# Altium PCB AltiumSTM32_PCB1.PcbDoc
Units mil, origin at the board's own origin, x right, y up, seen from the top; angles counter-clockwise.
Board outline 1427.17 x 1427.17 mil, 4 copper layers (L1(Signal), L2(GND), L3(GND), Bottom Layer), stack 61.811 mil thick; 35 components, 27 nets, 170 pads, 66 vias.
Unrouted connection lines stored in the file: 3.
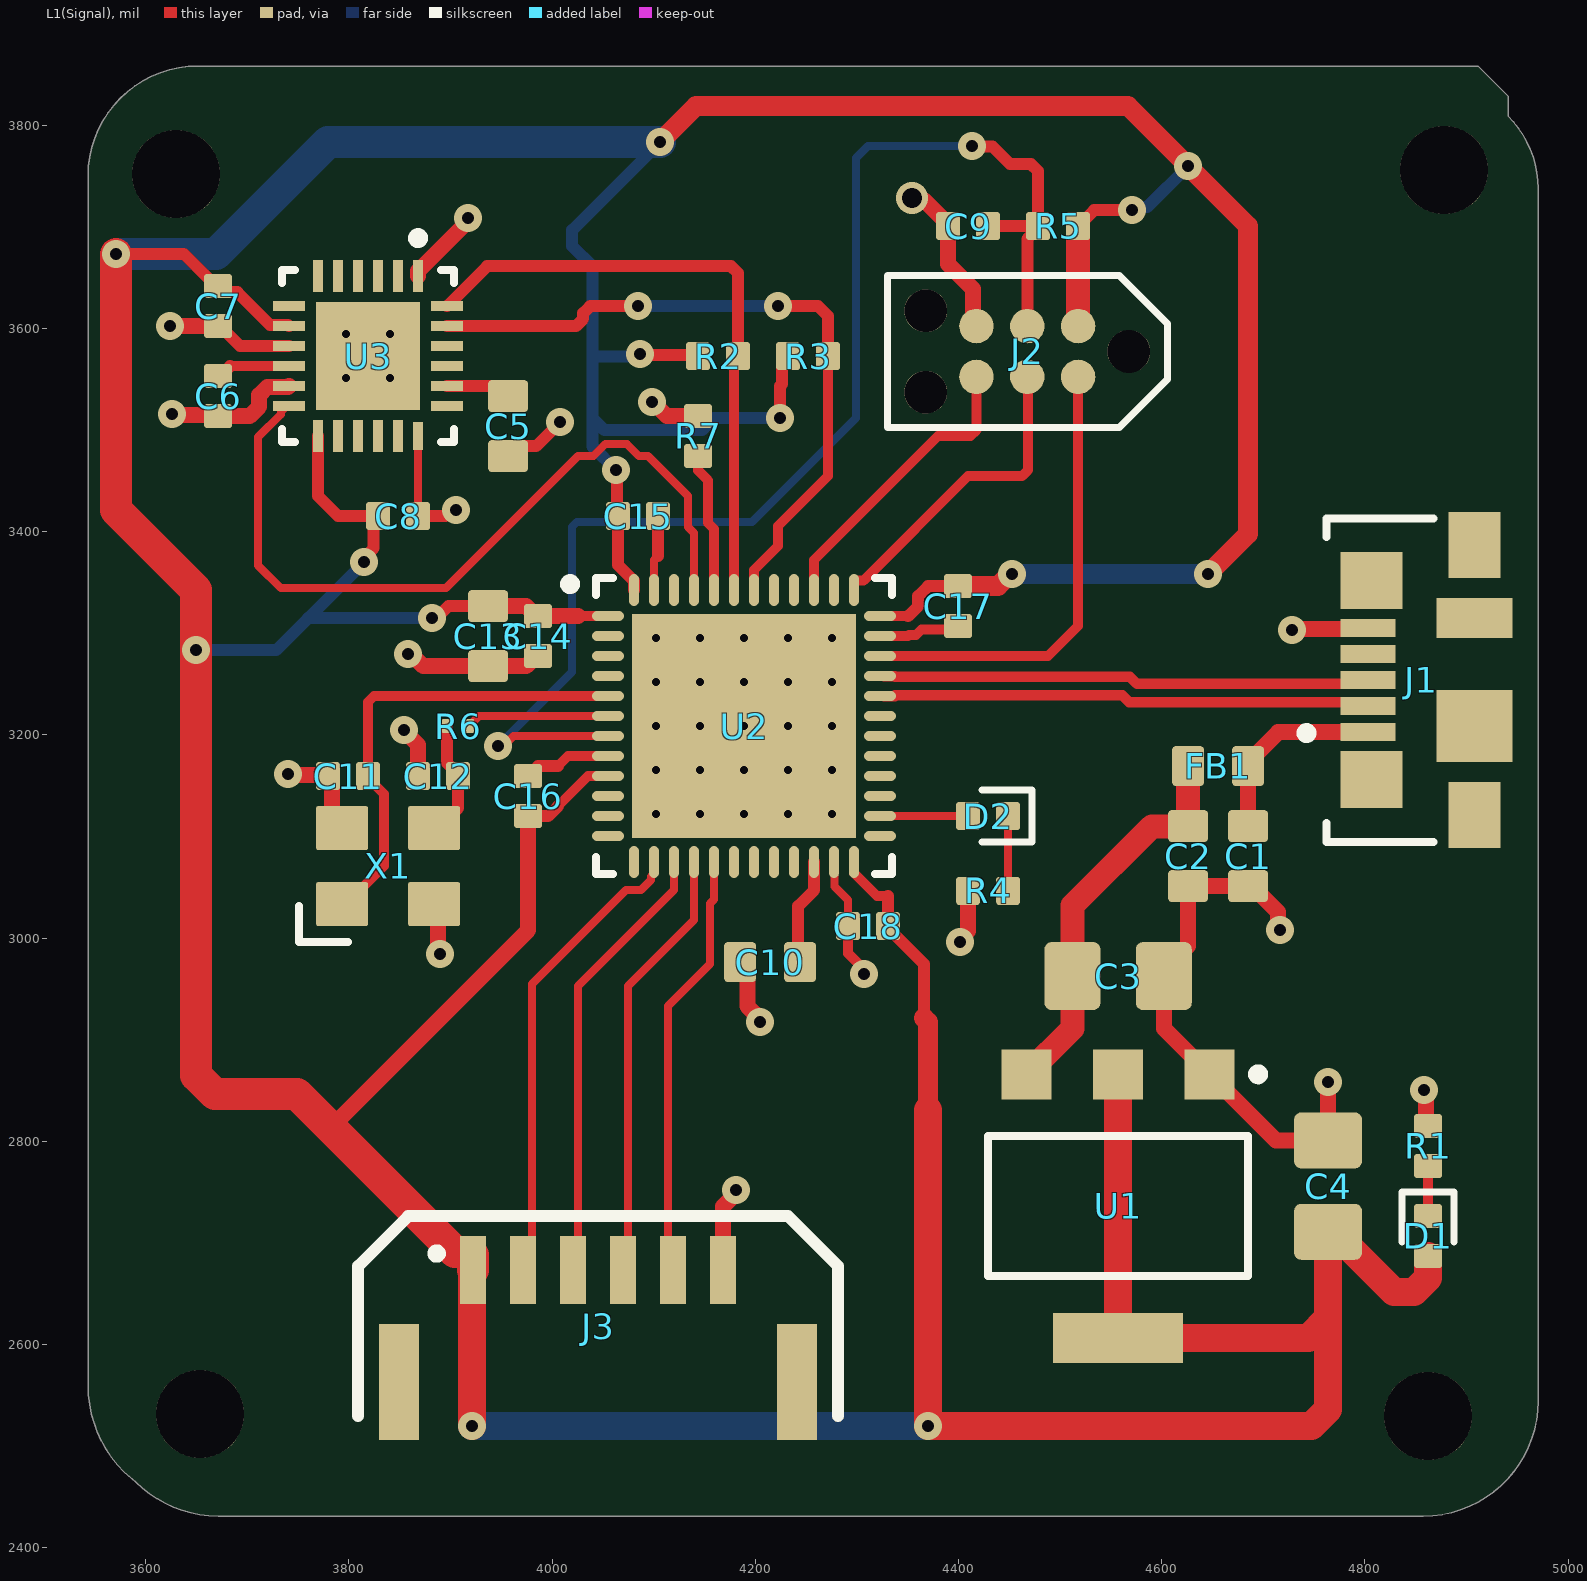
[diagram p0: L1(Signal) view]
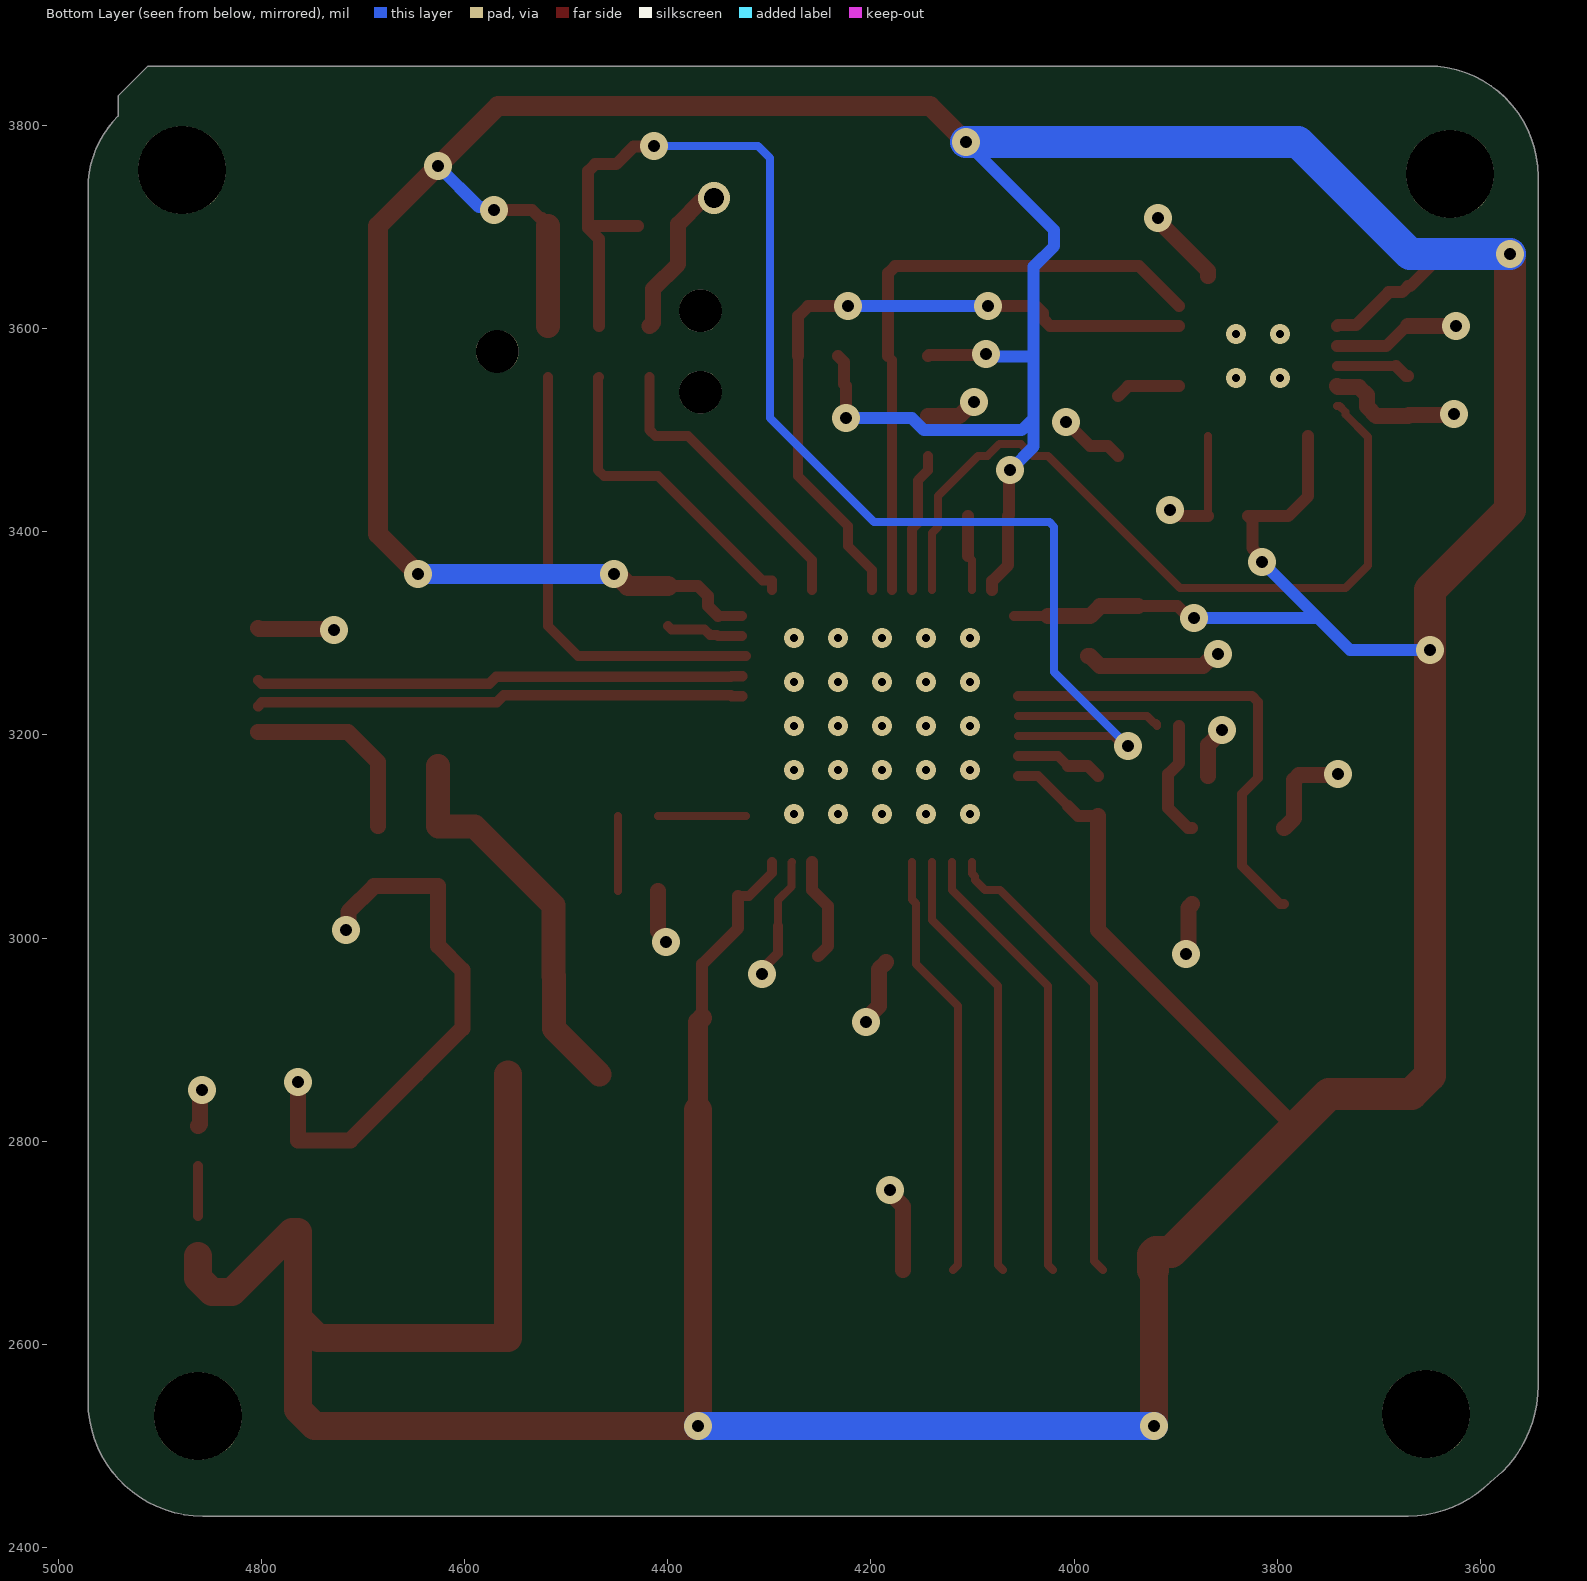
[diagram p1: Bottom Layer view, seen from below]
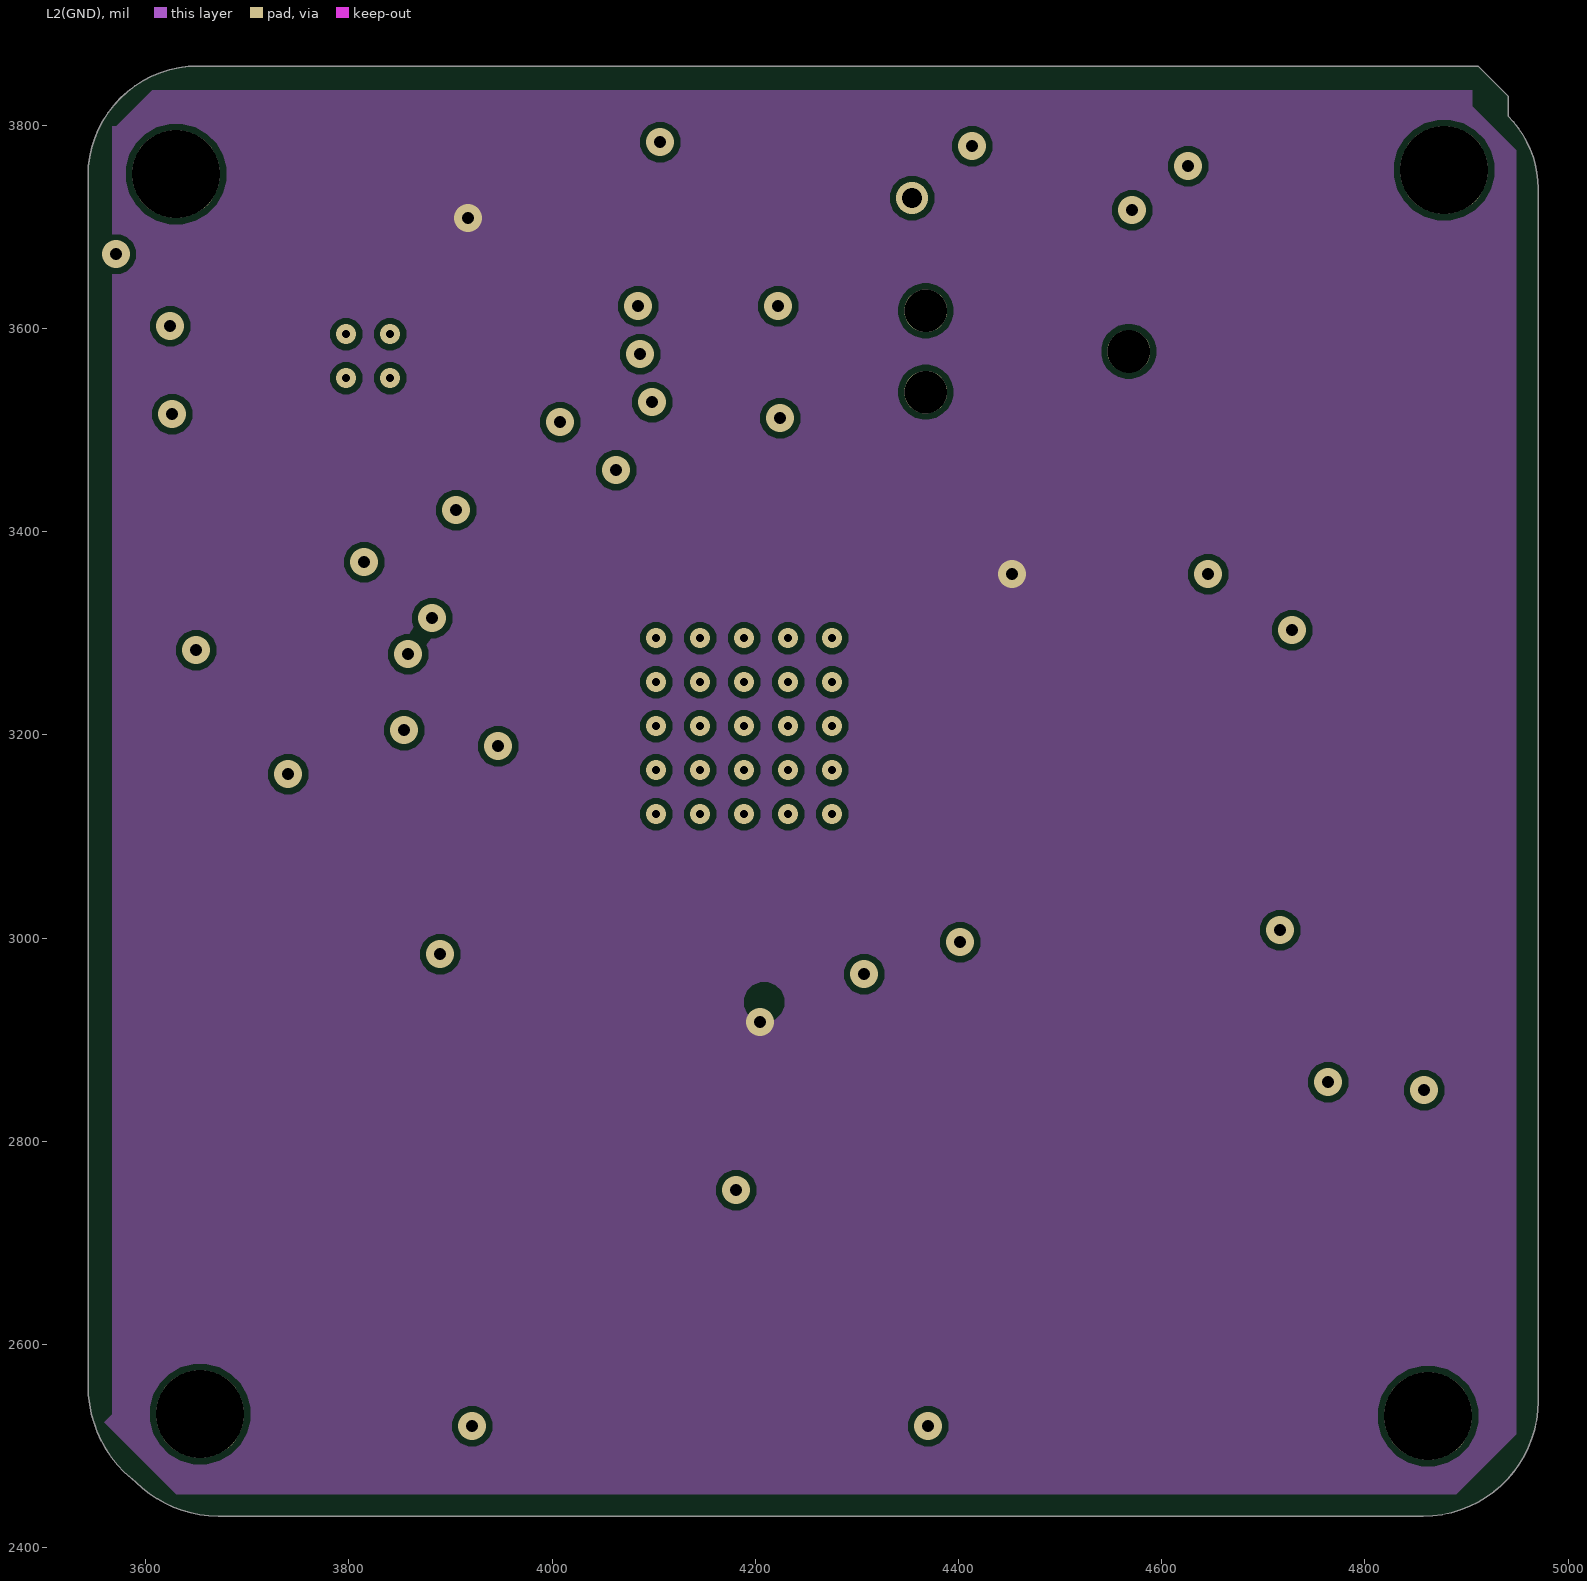
[diagram p2: L2(GND)]
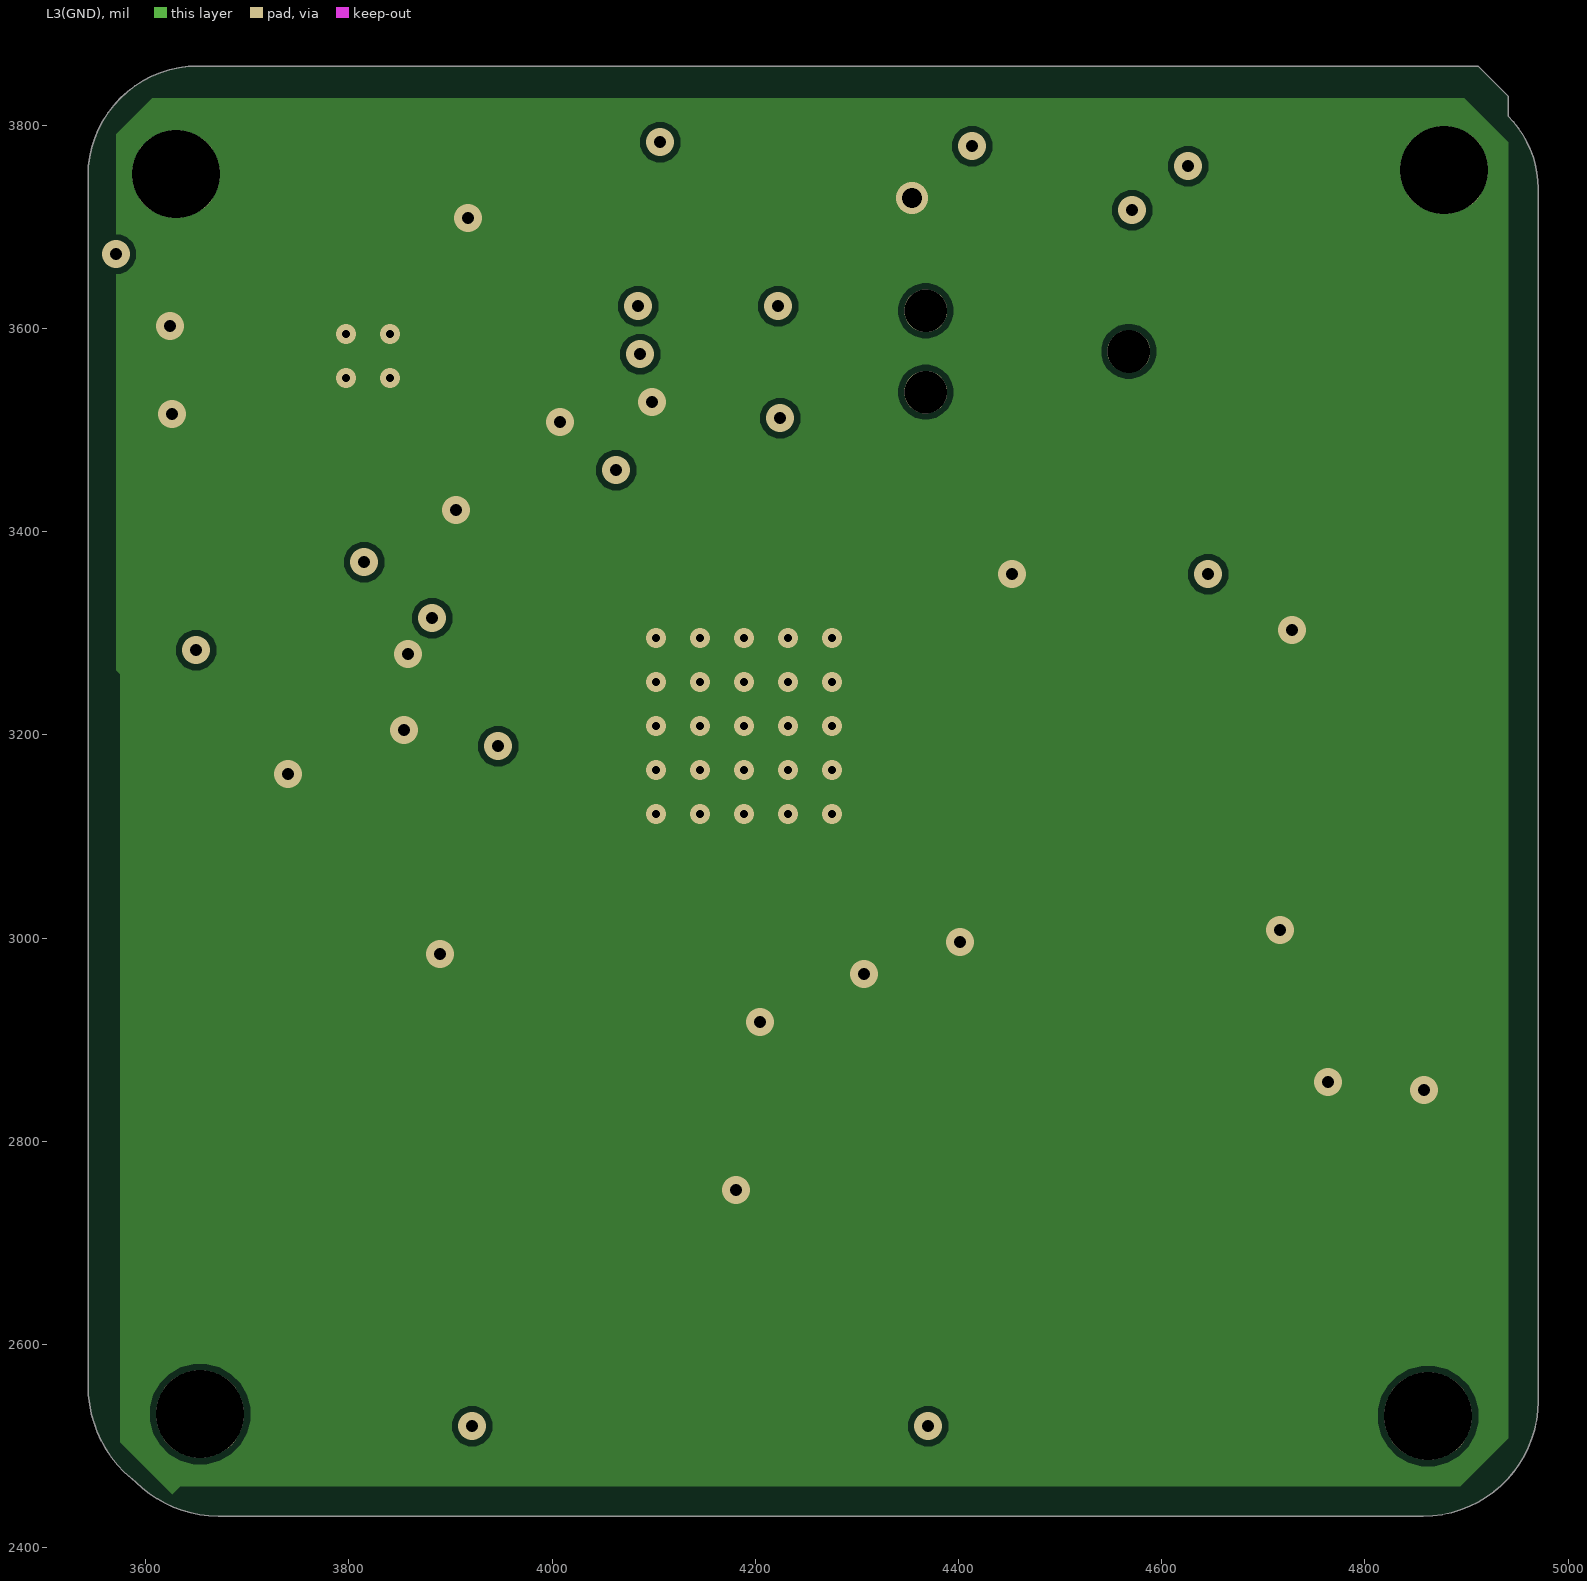
[diagram p3: L3(GND)]
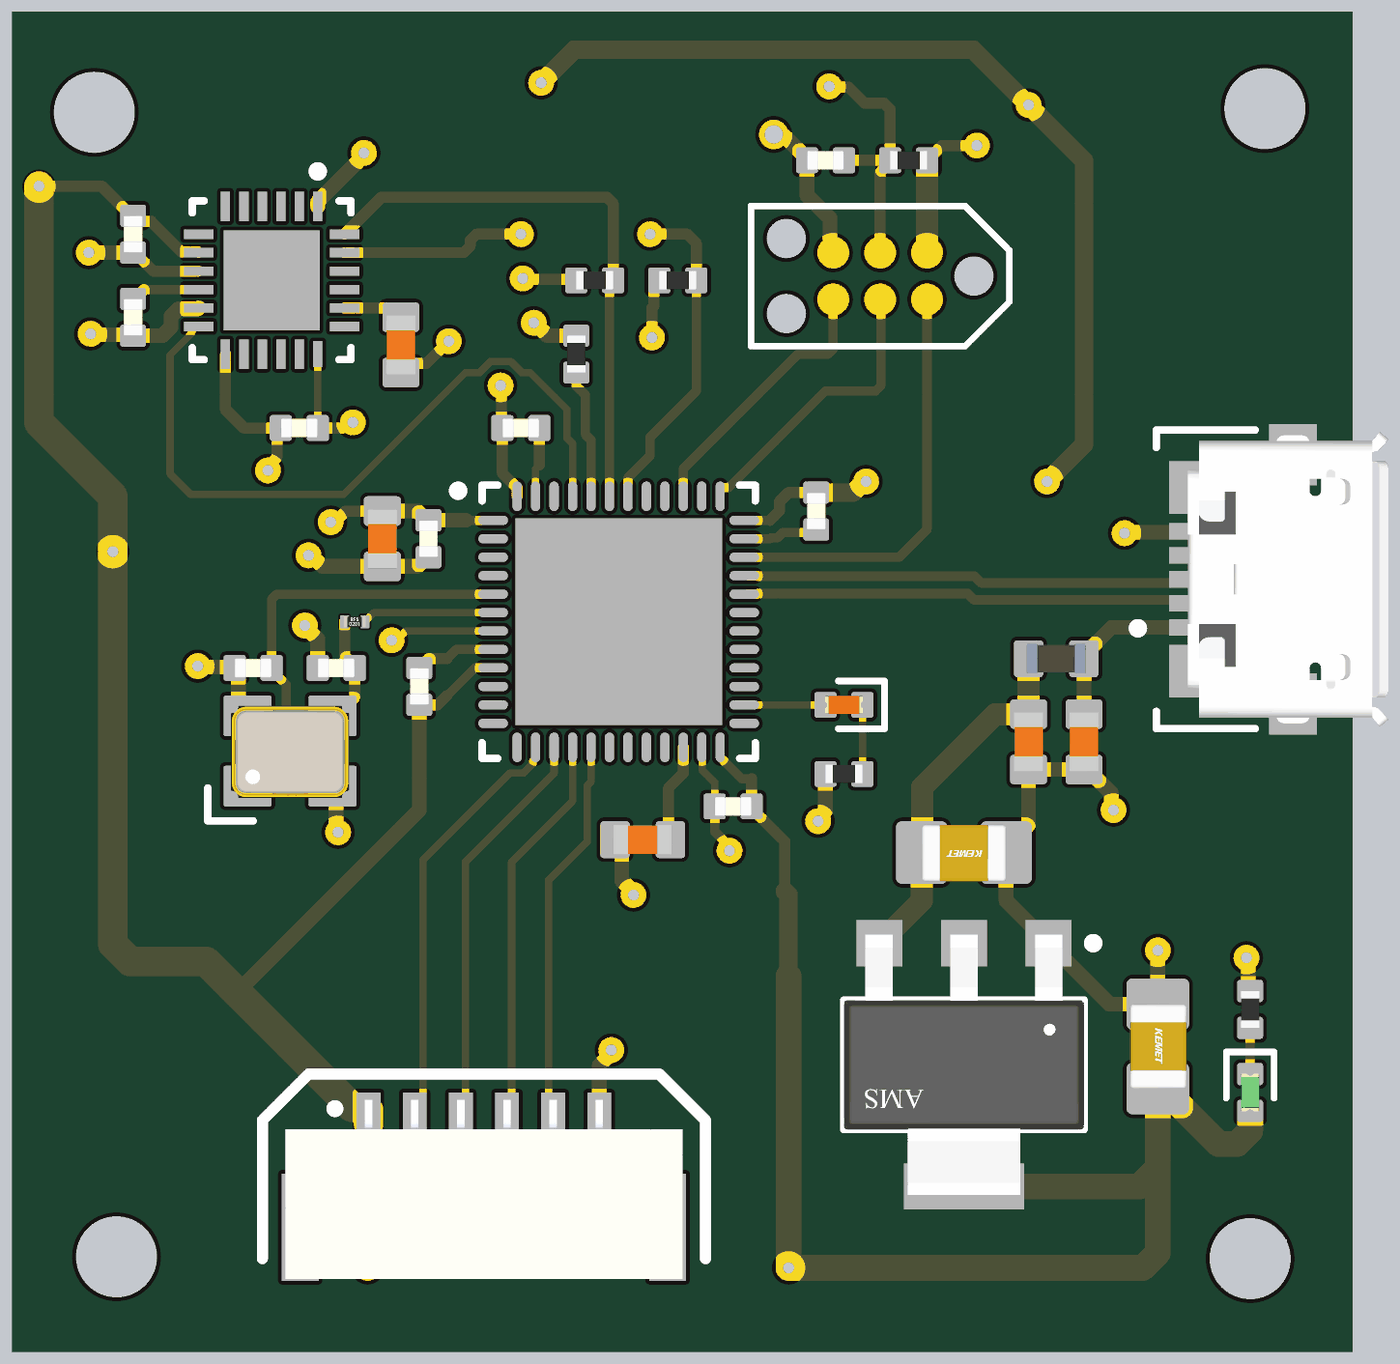
[diagram p4: 3D render of the assembled board from above, using the file's embedded part models]

## Layer stack, top to bottom
Top Solder: solder mask 1, SM-001, Dk 4
L1(Signal): signal copper 1.378
Dielectric 1: prepreg 7.874, PP-022, Dk 4.6
L2(GND): signal copper 0.689
Dielectric 3: core 41.9291, Core-039, Dk 4.6
L3(GND): signal copper 0.689
Dielectric 5: prepreg 7.874, PP-022, Dk 4.6
Bottom Layer: signal copper 1.378
Bottom Solder: solder mask 1, SM-001, Dk 4

## Board outline
3578.66,2474.49 3590.28,2464.64 ccw(c3671.26,2545.62) 3671.26,2431.1 4857.56,2431.1 ccw(c4857.56,2544.02) 4970.47,2544.02 4970.47,3737.77 ccw(c4869.66,3737.77) 4940.94,3809.06 4940.94,3828.74 4911.42,3858.27 4822.05,3858.27 3651.57,3858.27 ccw(c3651.57,3750) 3543.31,3750 3543.31,2559.84 ccw(c3664.02,2559.84)

## Design rules (kind name [scope] priority, off if disabled: settings)
Clearance Clearance_2 [All] p1: gap=5.91 ignorepadtopadclearanceinfootprint=FALSE
DiffPairsRouting [All] p1: maxlimit=8 minlimit=5 mostfreqgap=8 toplayer_mingap=8 toplayer_minwidth=10.24 toplayer_maxwidth=10.24 toplayer_prefwidth=10.24 bottomlayer_mingap=8 bottomlayer_minwidth=10.24 bottomlayer_maxwidth=10.24 bottomlayer_prefwidth=10.24 impedanceprofiledriven=TRUE impedanceprofileid={871EB140-BF40-4113-B43B-66A4798AFD4B} impedanceprofilevalue=90.000000 maxuncoupledlength=500
PolygonConnect [All] p1: connectstyle=Direct reliefconductorwidth=10 reliefentries=4 polygonreliefangle="90 Angle" airgapwidth=10
RoutingVias [All] p1: holewidth=11.81 width=27.56 viastyle="Through Hole" minholewidth=9.84 minwidth=19.68 maxholewidth=15.75 maxwidth=35.43
SolderMaskExpansion [All] p1: expansion=4 istentingtop=FALSE
SupplyNets "Schematic Supply Nets_3" [InNet('VBUS')] p1: voltage=0.000
SupplyNets "Schematic Supply Nets_2" [InNet('+3V3')] p2: voltage=0.000
SupplyNets "Schematic Supply Nets_1" [InNet('+5V')] p3: voltage=0.000
SupplyNets "Schematic Supply Nets" [InNet('GND')] p4: voltage=0.000
UnRoutedNet [All] p1: checkbadconnections=TRUE
Width [All] p1: maxlimit=39.37 minlimit=7.87 preferedwidth=15 minimp=50.000000 maximp=50.000000 favimp=50.000000
28 further rules are at their usual default settings.

## Classes and differential pairs
differential pair USB_D: +USB_D_P -USB_D_N

## Components (designator, comment, footprint, x,y, rotation, side; value= is the part's Value field where it differs from the comment)
C1 "2n2uF" CAP_0603 4685.04,3080.71 r90 top
C2 "2n2uF" CAP_0603 4625.98,3080.71 r90 top
C3 "22u" CAP_0805 4557.09,2962.6 r180 top
C4 "22u" CAP_0805 4763.78,2755.91 r270 top
C5 "2n2uF" CAP_0603 3956.69,3503.94 r90 top
C6 "100n" CAP_0402 3671.26,3533.46 r90 top
C7 "100n" CAP_0402 3671.26,3622.05 r90 top
C8 "100n" CAP_0402 3848.43,3415.35 r180 top
C9 "100n" CAP_0402 4409.45,3700.79 r0 top
C10 "2.2uf" CAP_0603 4214.57,2976.38 r0 top
C11 "10p" CAP_0402 3799.21,3159.45 r0 top
C12 "10p" CAP_0402 3887.8,3159.45 r0 top
C13 "2.2uf" CAP_0603 3937.01,3297.24 r90 top
C14 "100n" CAP_0402 3986.22,3297.24 r90 top
C15 "100n" CAP_0402 4084.65,3415.35 r180 top
C16 "100n" CAP_0402 3976.38,3139.76 r270 top
C17 "100n" CAP_0402 4399.61,3326.77 r90 top
C18 "100n" CAP_0402 4311.02,3011.81 r0 top
D1 "GREEN" LED_0402_GREEN 4862.2,2706.69 r90 top
D2 "RED" LED_0402_RED 4429.13,3120.08 r0 top
FB1 "120R" FB_0603 4655.51,3169.29 r180 top
J1 "473460001" FP-473460001-MFG 4894.09,3253.94 r90 top
J2 "TC2030-NL" TC2030-NL-FP 4467.72,3577.36 r180 top
J3 "SM06B-GHS-TB" SM06B-GHS-TB 4045.28,2618.11 r0 top
R1 "1k" RES_0402 4862.2,2795.28 r270 top
R2 "2K2" RES_0402 4163.39,3572.83 r180 top
R3 "2K2" RES_0402 4251.97,3572.83 r180 top
R4 "1k" RES_0402 4429.13,3046.46 r0 top
R5 "10K" RES_0402 4498.03,3700.79 r0 top
R6 "0R" RES_0201 3907.48,3208.66 r0 top
R7 "10K" RES_0402 4143.7,3494.09 r270 top
U1 "AMS1117-3.3" FP-AMS1117-IPC_C 4557.09,2736.22 r270 top
U2 "STM32F411CEU6" STM-UFQFPN48_L 4188.98,3208.66 r0 top
U3 "MPU-6050" IS-QFN-24_V 3818.9,3572.83 r270 top
X1 "24MHz" XTAL_3225 3838.58,3070.87 r0 top

## Footprints (in the part's own frame and the unit in brackets; to place one, negate y for a bottom-side part, rotate by r counter-clockwise, add the part's x,y. Pads: shape width x height; smd on the part's side, far side on the other; paste and mask are expansions set on the pad)
CAP_0402 [mm]
  rrect25% 0.6x0.7 smd: 1(-0.5,0) 2(0.5,0)
  body extent -0.5,-0.26 0.5,0.26, height 0.37
CAP_0603 [mm]
  rrect25% 0.8x1 smd: 1(-0.75,0) 2(0.75,0)
  body extent -0.8,-0.4 0.8,0.4, height 0.51
CAP_0805 [mm]
  rrect25% 1.4x1.7 smd: 1(-1.143,0) 2(1.143,0)
  body extent -1.15,-0.76 1.15,0.79, height 1.01
FB_0603 [mm]
  rrect25% 0.8x1 smd: 1(-0.75,0) 2(0.75,0)
  body extent -0.8,-0.4 0.8,0.4, height 0.81
FP-473460001-MFG [mm]
  rect 0.45x1.38 smd paste+0 mask+0: 1(-1.3,2.31) 2(-0.65,2.31) 3(0,2.31) 4(0.65,2.31) 5(1.3,2.31)
  rect 1.425x1.55 smd paste+0 mask+0: 6(-2.488,2.225) 7(2.488,2.225)
  rect 1.65x1.3 smd paste+0 mask+0: 8(-3.375,-0.35) 11(3.375,-0.35)
  rect 1.8x1.9 smd paste+0 mask+0: 9(-1.15,-0.35)
  rect 1x1.9 smd paste+0 mask+0: 10(1.55,-0.35)
  silkscreen extent -4.05,0.67 4.05,3.97, body extent -4.3,-2.48 4.3,3.45, height 0.25
FP-AMS1117-IPC_C [mm]
  rect 1.25x1.25 smd paste+0 mask+0: 1(-3.295,2.29) 2(-3.295,0) 3(-3.295,-2.29)
  rect 1.25x3.25 smd paste+0 mask+0: 4(3.295,0)
  silkscreen extent -3.42,-3.25 1.75,3.63, body extent -3.9,-3.35 3.9,3.35, height 0.25
IS-QFN-24_V [mm] "QFN, 24-Leads, Body 4x4mm, Pitch 0.5mm, Thermal Pad 2.7x2.6mm"
  rect 0.8x0.254 smd: 1(-2,1.25) 2(-2,0.75) 3(-2,0.25) 4(-2,-0.25) 5(-2,-0.75) 6(-2,-1.25) 13(2,-1.25) 14(2,-0.75) 15(2,-0.25) 16(2,0.25) 17(2,0.75)
  rect 0.254x0.8 smd mask+0.102: 7(-1.25,-1.975) 8(-0.75,-1.975) 9(-0.25,-1.975) 10(0.25,-1.975) 11(0.75,-1.975) 12(1.25,-1.975) 19(1.25,1.975) 20(0.75,1.975) 21(0.25,1.975) 22(-0.25,1.975) 23(-0.75,1.975) 24(-1.25,1.975)
  rect 0.7x0.254 smd: 18(2,1.25)
  rect 2.7x2.6 smd: 25(0,0)
  silkscreen extent -3.07,-2.15 2.15,2.15, body extent -2,-2 2,2, height 0.95
LED_0402_GREEN [mm]
  rrect25% 0.6x0.7 smd: A(-0.5,0) K(0.5,0)
  silkscreen extent -0.15,-0.65 1.1,0.65, body extent -0.51,-0.25 0.51,0.25, height 0.45
LED_0402_RED [mm]
  rrect25% 0.6x0.7 smd: A(-0.5,0) K(0.5,0)
  silkscreen extent -0.15,-0.65 1.1,0.65, body extent -0.51,-0.25 0.51,0.25, height 0.45
RES_0201 [mm]
  rrect25% 0.25x0.35 smd mask+0.05: 1(-0.275,0) 2(0.275,0)
  body extent -0.3,-0.15 0.3,0.15, height 0.15
RES_0402 [mm]
  rrect25% 0.6x0.7 smd: 1(-0.5,0) 2(0.5,0)
  body extent -0.5,-0.25 0.5,0.25, height 0.3
SM06B-GHS-TB [mm]
  rect 0.65x1.7 smd: 1(-3.125,1.4) 2(-1.875,1.4) 3(-0.625,1.4) 4(0.625,1.4) 5(1.875,1.4) 6(3.125,1.4)
  rect 1x2.9 smd: ""(-4.975,-1.4) ""(4.975,-1.4)
  silkscreen extent -6,-2.25 6,2.75, body extent -5.38,-2.8 5.38,2.05, height 4.26
STM-UFQFPN48_L [mm] "QFN, 48-Leads, Body 7.1x7.1mm, Pitch 0.5mm, Thermal Pad 5.6x5.6mm, IPC High Density"
  oval 0.8x0.25 smd: 1(-3.4,2.75) 2(-3.4,2.25) 3(-3.4,1.75) 4(-3.4,1.25) 5(-3.4,0.75) 6(-3.4,0.25) 7(-3.4,-0.25) 8(-3.4,-0.75) 9(-3.4,-1.25) 10(-3.4,-1.75) 11(-3.4,-2.25) 12(-3.4,-2.75) 25(3.4,-2.75) 26(3.4,-2.25) 27(3.4,-1.75) 28(3.4,-1.25) 29(3.4,-0.75) 30(3.4,-0.25) 31(3.4,0.25) 32(3.4,0.75) 33(3.4,1.25) 34(3.4,1.75) 35(3.4,2.25) 36(3.4,2.75)
  oval 0.25x0.8 smd: 13(-2.75,-3.4) 14(-2.25,-3.4) 15(-1.75,-3.4) 16(-1.25,-3.4) 17(-0.75,-3.4) 18(-0.25,-3.4) 19(0.25,-3.4) 20(0.75,-3.4) 21(1.25,-3.4) 22(1.75,-3.4) 23(2.25,-3.4) 24(2.75,-3.4) 37(2.75,3.4) 38(2.25,3.4) 39(1.75,3.4) 40(1.25,3.4) 41(0.75,3.4) 42(0.25,3.4) 43(-0.25,3.4) 44(-0.75,3.4) 45(-1.25,3.4) 46(-1.75,3.4) 47(-2.25,3.4) 48(-2.75,3.4)
  rect 5.6x5.6 smd: 49(0,0)
  silkscreen extent -4.47,-3.7 3.7,3.7, body extent -3.55,-3.55 3.55,3.55, height 0.6
TC2030-NL-FP [mil]
  round 33.98 smd paste-16.99: 1(-50,-25) 2(-50,25) 3(0,-25) 4(0,25) 5(50,-25) 6(50,25)
  round 42.01 hole 42.01 unplated: MH(-100,0) MH(100,-40) MH(100,40)
  silkscreen extent -138,-75 138,75
XTAL_3225 [mm]
  rrect10% 1.3x1.1 smd: 1(-1.15,-0.95) 2(1.15,-0.95) 3(1.15,0.95) 4(-1.15,0.95)
  silkscreen extent -2.23,-1.89 -1,-1, body extent -1.6,-1.28 1.6,1.22, height 0.61

## Part data
C1 C2 C5 C10 C13: library part CAP_0603, "Capacitor SMD 0603"
C3 C4: library part CAP_0805, "Capacitor SMD 0805"
C6 C7 C8 C9 C11 C12 C14 C15 C16 C17 C18: library part CAP_0402, "Capacitor SMD 0402"
D1: library part LED_0402_GREEN, "LED 0402 GREEN SMD"
D2: library part LED_0402_RED, "LED 0402 RED SMD"
FB1: library part FB_0603, "Ferrite Bead SMD 0603"
J1: library part CMP-2000-05246-2, "CONN RCPT USB2.0 MICRO B SMD R/A", Current Rating=1.8A, Manufacturer=Molex, Package=0, Temperature="-30°C to +85°C", Temperature Range High=+85°C, Temperature Range Low=-30°C, Voltage Rating=30V, Automotive=No, Category=Conn, ComponentLink2Description=Datasheet, ComponentLink2URL=https://www.molex.com/webdocs/datasheets/pdf/en-us/0473460001_IO_CONNECTORS.pdf, Conn Orientation="Right Angle", Contact Material=Gold,Nickel, Device Class L1=Connectors, Device Class L2="USB Connectors", Device Class L3=unset, Digikey Description="CONN RCPT USB2.0 MICRO B SMD R/A", Footprint Url=https://www.molex.com/pdm_docs/sd/473460001_sd.pdf, Height=2.945mm, Is Female=yes, Lead Free=Yes, Manufacturer Part Number=473460001, Number Of Contacts=5, Octopart=https://octopart.com/47346-0001-molex-7164928, Pitch=0.65mm, RoHS=TRUE, Shielding=true, Usb Standard="USB 2.0"
J2: "Tag-Connect No-Solder SWD Debug Connector (No Legs) DO NOT PLACE", Manufacturer=Tag-Connect, Manufacturer Part Number=TC2030-NL-FP
J3: "Header Connector 6 Position 1.25MM Pitch SMD Horizontal JST GH", Manufacturer=JST, Manufacturer Part Number=SM06B-GHS-TB
R1 R2 R3 R4 R5 R7: library part RES_0402, "Resistor SMD 0402"
R6: library part RES_0201, "Resistor SMD 0201"
U1: library part CMP-209535-000001-1, "LDO Voltage Regulators 1A, 3.3V", Dropout Voltage=1.1V, Manufacturer="Advanced Monolithic Systems", Max Junction Temp=+125°C, Max Power Dissipation=1.2W, Max Supply Voltage=15V, Nominal Supply Current=5mA, Output Current=1A, Output Voltage=3.3V, Package=AMS1117, Temperature="-40°C to +125°C", Temperature Range Low=-40°C, Automotive=No, Category=IC, ComponentLink2Description=Datasheet, ComponentLink2URL=http://www.advanced-monolithic.com/pdf/ds1117.pdf, Device Class L1="Integrated Circuits (ICs)", Device Class L2="Power Management ICs", Device Class L3="Voltage Regulators - Linear", Height=1.8mm, Ipc Land Pattern Name=SOT229P700X180-4, Lead Free=Yes, Manufacturer Part Number=AMS1117-3.3, Number Of Outputs=1, Octopart=https://octopart.com/ams1117-3.3-advanced+monolithic+systems-25899300, Output Type=Fixed, RoHS=TRUE, Standoff Height=0.64mm, Temperature Range High=+125°C
U2: library part CMP-0243-00165-1, "ARM Cortex-M4 32-bit MCU+FPU, 512 KB Flash, 128 KB RAM, 36 I/Os, 48-Pin UFQFPN, -40 to 85 degC, Tray", I/Os (High Current)=36, Operating Frequency(F) (Processor speed) (MHz)=100, Package Description=UFQFPN48, Package Reference="48-Pin Ultra Thin Fine Pitch Quad Flat No-Lead, 7 x 7 x 0.6 mm Body, 0.5 mm Pitch, Exposed Pad", Supply Voltage(Vcc) min (V)=1.7, ComponentLink1Description="Manufacturer URL", ComponentLink1URL=http://www.st.com/, ComponentLink2Description=Datasheet, ComponentLink2URL=http://www.st.com/st-web-ui/static/active/en/resource/technical/document/datasheet/DM00115249.pdf, Core="ARM Cortex-M4", DatasheetVersion="Rev. 6", FLASH Size (Prog) (kB)=512, Internal RAM Size (kB)=128, Mounting Technology="Surface Mount", Packing=Tray
U3: library part CMP-1753-00002-2, "3-Axis Gyroscope, Accelerometer and a Digital Motion Processor(TM) (DMP), 2.375 to 3.46 V, -40 to 85 degC, 24-Pin QFN, RoHS, Tape and Reel", Manufacturer=InvenSense, Standard Package=5,000, Category=Sensors,Transducers, Datasheet URL=http://datasheet.octopart.com/MPU-6050-InvenSense-datasheet-14421344.pdf, Datasheet Version="Rev. 3.3, 05/2012", Dynamic Catalog=MPU-6000™Series, Family=Multifunction, Featured Product=MPU-60506-Axis,IntegratedI²CSolution, Manufacturer URL=http://www.invensense.com/, Online Catalog=MPU-6000™Series, Other Names="1428-1007-2 / MPU6050", Output Type=Digital, Sensor Type=MotionTracking, Unit PriceUSD=Digital
X1: library part TSX-3225_24.0000MF15X-AC, "Crystal SMD 24MHz 10PPM 7pF 3225", Manufacturer=Epson, Manufacturer Part Number="TSX-3225 24.0000MF15X-AC"

## Free pads (board coordinates)
  round 86.61 hole 86.61 unplated: MH(3629.92,3751.97) MH(3653.54,2531.5) MH(4862.2,2529.53) MH(4877.95,3755.91)

## Via types
v1: diameter 27.56, hole 11.81, L1(Signal) to Bottom Layer, 36 vias
v2: diameter 19.68, hole 7.87, L1(Signal) to Bottom Layer, 29 vias
v3: diameter 31.5, hole 19.68, L1(Signal) to Bottom Layer, 1 vias

## Nets (pads, with @x,y where several pads share a name; then routed paths per layer and width w, separated by ;. In a path a pad name is that pad's centre, name@x,y a point inside that pad or via, vN(x,y) a via of type N, cw(c..) or ccw(c..) an arc to the next point about the centre after c; other vN are vias at no path point)
+3V3: C4.2 C7.2 C8.2 C13.2 C14.2 C15.2 C16.2 C17.2 C18.2 D1.A J2.1 J3.1 R2.2 R3.2 R5.2 U1.2 U1.4 U2.1 U2.9 U2.24 U2.36 U2.48 U3.8 U3.13 | length 7985.3
  L1(Signal) w9.84: 4005.91,3129.92 4035.43,3159.45 U2.9 ; 4025.59,3316.93 U2.1 U2.1@4059.06,3316.93 ; U2.24 4297.24,3063.98 4319.88,3041.34 4330.71,3041.34 ; U2.36@4326.77,3316.93 4350.39,3316.93
  L1(Signal) w11.81: v1(3570.87,3673.23) 3637.8,3673.23 C7.2@3669.29,3641.73 ; C7.2 3677.17,3635.83 3690.47,3635.83 3690.47,3635.27 3722.47,3603.27 3740.24,3603.27 U3.8 ; U3.13 3769.68,3435.04 3789.37,3415.35 C8.2 3824.48,3411.09 3824.48,3383.86 3814.96,3374.34 v1(3814.96,3370.08) ; v1(3881.89,3314.96) 3886.15,3314.96 3897.96,3326.77 C13.2 ; C16.2 3996.06,3120.08 4005.91,3129.92 ; v1(4062.99,3460.63) 4063.98,3459.65 4063.98,3416.34 C15.2 4064.96,3367.13 4080.71,3351.38 U2.48 ; v1(4086.61,3574.8) 4087.6,3573.82 4142.72,3573.82 R2.2 ; v1(4224.41,3511.81) 4224.41,3543.31 4226.38,3545.28 4226.38,3566.93 R3.2 ; 4330.71,3041.34 C18.2 4330.71,3009.84 4366.14,2974.41 4366.14,2921.26 ; 4350.39,3316.93 4360.24,3326.77 4360.24,3336.61 4370.08,3346.46 C17.2 ; R5.2 4517.72,3702.76 4523.62,3708.66 4525.59,3708.66 4533.46,3716.54 v1(4570.87,3716.54)
  L1(Signal) w15.75: 3781.99,2813.48 3976.38,3007.87 C16.2 ; C13.2 3974.41,3326.77 3984.25,3316.93 4025.59,3316.93
  L1(Signal) w19.68: v1(4106.3,3783.46) 4141.73,3818.9 4566.93,3818.9 4685.04,3700.79 4685.04,3397.64 v1(4645.67,3358.27) ; 4366.14,2921.26 4370.08,2917.32 4370.08,2830.71 ; C17.2 4438.81,3346.46 4450.63,3358.27 v1(4452.76,3358.27)
  L1(Signal) w23.62: J2.1 R5.2
  L1(Signal) w27.56: v1(3921.26,2519.68) 3921.26,2672.24 J3.1 ; 4370.08,2830.71 v1(4370.08,2519.68) 4747.64,2519.68 4763.78,2535.83 4763.78,2625.98 ; U1.2 U1.4 4744.29,2606.5 4763.78,2625.98 ; D1.A 4862.2,2665.63 4848.37,2651.79 4828.8,2651.79 4769.69,2710.91 C4.2 4763.78,2625.98
  L1(Signal) w31.5: v1(3570.87,3673.23) 3570.87,3421.26 3649.61,3342.52 v1(3649.61,3283.46) 3649.61,2864.91 3668.06,2846.46 3749.02,2846.46 3781.99,2813.48 3904.53,2690.94 3919.29,2690.94 3922.24,2687.99 J3.1
  Bottom Layer w11.81: v1(3649.61,3283.46) 3728.35,3283.46 3759.84,3314.96 ; v1(3814.96,3370.08) 3759.84,3314.96 ; v1(3881.89,3314.96) 3759.84,3314.96 ; v1(4062.99,3460.63) 4039.83,3483.79 4039.83,3511.81 ; v1(4086.61,3574.8) 4084.18,3572.37 4039.83,3572.37 ; v1(4106.3,3783.46) 4019.68,3696.85 4019.68,3681.1 4039.83,3660.96 4039.83,3572.37 ; v1(4224.41,3511.81) 4159.48,3511.81 4147.67,3500 4051.64,3500 4039.83,3511.81 ; v1(4570.87,3716.54) 4573.88,3719.55 4585.69,3719.55 v1(4625.98,3759.84) ; 4039.83,3511.81 4039.83,3572.37
  Bottom Layer w19.68: v1(4452.76,3358.27) v1(4645.67,3358.27)
  Bottom Layer w27.56: v1(3921.26,2519.68) v1(4370.08,2519.68)
  Bottom Layer w31.5: v1(3570.87,3673.23) 3669.29,3673.23 3779.53,3783.46 v1(4106.3,3783.46)
+5V: C2.2 C3.2 FB1.2 U1.3 | length 389.9
  L1(Signal) w23.62: U1.3 4512.09,2911.1 C3.2 ; C3.2@4512.39,2962.6 4512.39,3032.07 4590.27,3109.96 4625.7,3109.96 C2.2 FB1.2
GND: C1.1 C2.1 C3.1 C4.1 C5.1 C6.1 C7.1 C8.1 C9.1 C10.1 C11.1 C12.1 C13.1 C14.1 C15.1 C16.1 C17.1 C18.1 J1.5 J2.5 J3.6 R1.1 R4.1 R7.1 U1.1 U2.8 U2.23 U2.35 U2.47 U2.49 U3.1 U3.9 U3.11 U3.18 U3.25 X1.2 X1.4 | length 2272.7
  L1(Signal) w7.87: C8.1 U3.18 ; U2.47 4100.39,3372.05 4104.33,3375.98 ; U2.23 4277.94,3074.43 4277.94,3050.8 4291.34,3037.4 C18.1 ; v1(4307.09,2964.57) v1@4307.09,2969.26
  L1(Signal) w9.84: 4005.91,3169.29 4015.75,3179.13 U2.8 ; C18.1 4291.34,2985.01 v1@4307.09,2969.26 ; U2.35@4326.77,3297.24 4350.39,3297.24 4351.38,3298.23 4358.14,3298.23 4363.62,3303.71 4396.23,3303.71 C17.1
  L1(Signal) w11.81: C7.1@3673.23,3602.36 3692.91,3582.68 U3.9 ; C8.1 3895.34,3415.35 3901.25,3421.26 v1(3905.51,3421.26) ; C5.1 3966.54,3484.25 3984.25,3484.25 v1(4007.87,3507.87) ; C16.1 3986.22,3169.29 4005.91,3169.29 ; 4104.33,3375.98 C15.1
  L1(Signal) w15.75: v1(3624.02,3602.36) C7.1 ; v1(3625.98,3515.75) 3626.97,3514.76 3670.28,3514.76 C6.1 3702.39,3513.78 3711.61,3523 3711.61,3534.33 3719.69,3542.4 3740.24,3542.4 U3.11 ; v1(3740.16,3161.42) 3741.14,3160.43 3778.54,3160.43 C11.1 3783.46,3155.51 3783.46,3118.11 X1.4 ; v1(3854.33,3204.72) 3854.33,3203.82 3868.11,3190.04 C12.1 ; v1(3858.27,3279.53) 3861.46,3279.53 3873.27,3267.72 C13.1 3974.41,3267.72 3984.25,3277.56 C14.1 ; U3.1 3868.11,3656.58 v1@3917.32,3705.79 ; X1.2 3887.5,3029.82 3887.5,2986.51 v1(3889.76,2984.25) ; v1(4098.43,3527.56) 4099.33,3527.56 4113.11,3513.78 R7.1 ; J3.6 4168.31,2735.98 4181.1,2748.77 v1(4181.1,2751.97) ; C10.1 4192.17,2969.24 4192.17,2933.07 4204.72,2920.52 v1(4204.72,2917.32) ; v3(4354.33,3728.35) 4356.59,3726.09 4366.43,3726.09 4389.76,3702.76 C9.1 4389.76,3663.39 4414.23,3638.92 4414.23,3605.85 J2.5 ; v1(4401.57,2996.06) 4401.57,2999.26 4409.45,3007.13 R4.1 ; v1(4716.54,3007.87) 4714.28,3010.13 4714.28,3025.88 4688.98,3051.18 C1.1 C2.1 4625.98,2992.4 4602.09,2968.5 C3.1 4602.09,2911.1 U1.1 4712.28,2800.91 C4.1 v1(4763.78,2858.27) ; v1(4728.35,3303.15) 4729.33,3304.13 4802.17,3304.13 J1.5 ; v1(4858.27,2850.39) 4860.24,2848.43 4860.24,2816.93 R1.1
  other v1: 3917.32,3708.66
  other v2: 4102.36,3122.05 4145.67,3122.05 4188.98,3122.05 4232.28,3122.05 4275.59,3122.05 4102.36,3165.35 4145.67,3165.35 4188.98,3165.35 4232.28,3165.35 4275.59,3165.35 4102.36,3208.66 4145.67,3208.66 4188.98,3208.66 4232.28,3208.66 4275.59,3208.66 4102.36,3251.97 4145.67,3251.97 4188.98,3251.97 4232.28,3251.97 4275.59,3251.97 4102.36,3295.28 4145.67,3295.28 4188.98,3295.28 4232.28,3295.28 4275.59,3295.28 3797.24,3551.18 3840.55,3551.18 3797.24,3594.49 3840.55,3594.49
IMU_CPOUT: C5.2 U3.20 | length 64.1
  L1(Signal) w11.81: U3.20 3946.85,3543.31 C5.2
IMU_INT: U2.45 U3.12 | length 778.2
  L1(Signal) w7.87: U3.12 3738.67,3523.62 3733.07,3518.02 3733.07,3515.55 3710.63,3493.11 3710.63,3366.82 3732.96,3344.49 3895.67,3344.49 4025.59,3474.41 4040.58,3474.41 4052.39,3486.22 4073.59,3486.22 4085.4,3474.41 4094.49,3474.41 4133.86,3435.04 4133.86,3404.49 4139.76,3398.58 U2.45
IMU_REGOUT: C6.2 U3.10 | length 74
  L1(Signal) w9.84: C6.2@3683.07,3562.99 U3.10
  L1(Signal) w11.81: C6.2 3673.23,3553.15 C6.2@3683.07,3562.99
IMU_SCL: R3.1 U2.42 U3.23 | length 690.5
  L1(Signal) w9.84: U2.42 4198.82,3362.2 4222.44,3385.83 4222.44,3405.51 4271.65,3454.72 R3.1
  L1(Signal) w11.81: U3.23 4023.59,3602.36 4030.51,3609.28 4030.51,3615.13 4037.43,3622.05 v1(4084.65,3622.05) ; v1(4222.44,3622.05) 4261.81,3622.05 4271.65,3612.2 R3.1
  Bottom Layer w11.81: v1(4084.65,3622.05) v1(4222.44,3622.05)
IMU_SDA: R2.1 U2.43 U3.24 | length 619.2
  L1(Signal) w9.84: U2.43 4179.13,3568.9 R2.1
  L1(Signal) w11.81: U3.24 3936.02,3661.42 4176.15,3661.42 4183.07,3654.5 R2.1
MCU_BOOT0: R7.2 U2.44 | length 138.4
  L1(Signal) w9.84: R7.2 4143.7,3460.38 4153.54,3450.54 4153.54,3408.46 4159.45,3402.56 U2.44
MCU_LED_A: D2.A U2.26 | length 86.6
  L1(Signal) w7.87: U2.26 D2.A
MCU_LED_K: D2.K R4.2 | length 73.6
  L1(Signal) w7.87: R4.2 D2.K
MCU_NRST: C9.2 J2.3 R5.1 U2.7 | length 1338.5
  L1(Signal) w7.87: v1(3946.85,3188.98) 3952.18,3188.98 3962.02,3198.82 U2.7
  L1(Signal) w11.81: v1(4413.39,3779.53) 4414,3778.91 4433.69,3778.91 4450.79,3761.81 4471.43,3761.81 4478.35,3754.89 R5.1 ; C9.2 R5.1 ; J2.3 4467.72,3688.19 4478.35,3698.82 R5.1
  Bottom Layer w7.87: v1(3946.85,3188.98) 4019.68,3261.81 4019.68,3404.84 4024.3,3409.45 4196.85,3409.45 4299.21,3511.81 4299.21,3767.72 4311.02,3779.53 v1(4413.39,3779.53)
MCU_OSC_IN: R6.2 U2.6 | length 142
  L1(Signal) w7.87: R6.2 3918.31,3210.63 3919.29,3211.61 3921.26,3211.61 3928.15,3218.5 3937.01,3218.5 U2.6
MCU_OSC_OUT: C11.2 U2.5 X1.1 | length 463.5
  L1(Signal) w9.84: X1.1 3797.24,3033.46 3834.65,3070.87 3834.65,3141.73 3818.9,3157.48 C11.2 3818.9,3232.42 3824.66,3238.19 U2.5
MCU_PA4: J3.2 U2.14 | length 463.7
  L1(Signal) w7.87: J3.2 3980.32,2682.09 3980.32,2954.72 4072.83,3047.24 4087.64,3047.24 4097.44,3057.05 4097.44,3060.49 4100.39,3063.44 U2.14
MCU_PA5: J3.3 U2.15 | length 442.8
  L1(Signal) w7.87: J3.3 4025.59,2678.15 4025.59,2952.76 4120.08,3047.24 U2.15
MCU_PA6: J3.4 U2.16 | length 430.5
  L1(Signal) w7.87: J3.4 4074.8,2678.15 4074.8,2952.76 4139.76,3017.72 U2.16
MCU_PA7: J3.5 U2.17 | length 422.4
  L1(Signal) w7.87: J3.5 4114.17,2678.15 4114.17,2933.07 4155.51,2974.41 4155.51,3034.08 4159.45,3038.02 U2.17
MCU_SWCLK: J2.4 U2.37 | length 317.9
  L1(Signal) w9.84: U2.37 4297.24,3352.01 4306.73,3352.01 4409.45,3454.72 4462.74,3454.72 4468.5,3460.49 4468.5,3551.57 J2.4
MCU_SWDIO: J2.2 U2.34 | length 452.4
  L1(Signal) w9.84: U2.34 4488.19,3277.56 4517.72,3307.09 J2.2
MCU_SWO: J2.6 U2.39 | length 294.8
  L1(Signal) w9.84: U2.39 4257.87,3372.05 4379.92,3494.09 4411.95,3494.09 4417.72,3499.86 J2.6
MCU_VCAP1: C10.2 U2.22 | length 103.1
  L1(Signal) w11.81: C10.2@4251.97,2982.28 4242.13,2992.13 4242.13,3031.5 4257.87,3047.24 U2.22
NetD1_K: D1.K R1.2 | length 49.2
  L1(Signal) w9.84: D1.K R1.2
USB_D_N: J1.2 U2.32 | length 481.1
  L1(Signal) w10.24: U2.32@4326.77,3238.19 4337.2,3238.19 4337.92,3238.91 4561.24,3238.91 4568.13,3232.02 4799.48,3232.02 J1.2
USB_D_P: J1.3 U2.33 | length 481.1
  L1(Signal) w10.24: U2.33@4326.77,3257.87 4337.2,3257.87 4337.92,3257.15 4568.8,3257.15 4575.69,3250.26 4799.48,3250.26 J1.3
VBUS: C1.2 FB1.1 J1.1 | length 193.3
  L1(Signal) w15.75: C1.2 FB1.1 4685.04,3173.23 4714.57,3202.76 J1.1
XTAL_IN: C12.2 R6.1 X1.3 | length 117
  L1(Signal) w11.81: X1.3 3887.8,3108.27 3907.48,3127.95 C12.2 3907.48,3161.42 3896.65,3172.24 R6.1
pads on no net: J1.4 J1.6 J1.7 J1.8 J1.9 J1.10 J1.11 J2.MH J3. U2.2 U2.3 U2.4 U2.10 U2.11 U2.12 U2.13 U2.18 U2.19 U2.20 U2.21 U2.25 U2.27 U2.28 U2.29 U2.30 U2.31 U2.38 U2.40 U2.41 U2.46 U3.2 U3.3 U3.4 U3.5 U3.6 U3.7 U3.14 U3.15 U3.16 U3.17 U3.19 U3.21 U3.22

## Polygon pours and split planes (outlines as drawn)
no net on L1(Signal) "NONET_L01_P001" (solid, pour order 1): 4828.74,3210.63 4822.83,3204.72 4791.34,3204.72
GND on L3(GND) "GND_L03_P007" (solid, pour order 7): 3569.44,3262.3 3570.87,3263.73 3570.87,3791.34 3606.3,3826.77 4897.64,3826.77 4940.94,3783.46 4940.94,2507.87 4893.7,2460.63 3633.86,2460.63 3625.98,2452.76 3574.8,2503.94 3574.8,3259.84 3570.87,3263.78
no net on L2(GND) "NONET_L02_P005" (solid, pour order 5): 3566.93,3799.21 3570.87,3799.21 3606.3,3834.65 4905.51,3834.65 4905.51,3818.9 4948.82,3775.59 4948.82,2511.81 4889.76,2452.76 3629.92,2452.76 3559.06,2523.62 3566.93,2531.5 3566.93,3051.18 3566.93,2531.5 3566.93,3051.18

## Silkscreen, mask and mechanical layers (free items; w line width, h text height)
Mechanical 1:
  lines w10: 3543.31,2559.84 ccw(c3664.02,2559.84) 3578.66,2474.49 3590.28,2464.64 ccw(c3671.26,2545.62) 3671.26,2431.1 4857.56,2431.1 ccw(c4857.56,2544.02) 4970.47,2544.02 4970.47,3737.77 ccw(c4869.66,3737.77) 4940.94,3809.06 4940.94,3828.74 4911.42,3858.27 4862.2,3858.27 4822.05,3858.27 3651.57,3858.27 ccw(c3651.57,3750) 3543.31,3750 3543.31,2559.84

## Text inside footprints (layer, text, board x,y; h text height)
D1: Mechanical 13 "+" at 4842.19,2632.55 h19.68 r90
D2: Mechanical 13 "+" at 4354.99,3140.1 h19.68